# Altium PCB TimeHAT.PcbDoc (part 3 of 3)
Units mil, origin at the board's own origin, x right, y up, seen from the top; angles counter-clockwise.
Board outline 2559.54 x 2225.8 mil, 4 copper layers (L01-TOP, L02-GND, L03-GND, L04-BOT), stack 17.5 mil thick; 36 components, 124 nets, 365 pads, 394 vias.
Unrouted connection lines stored in the file: 194.
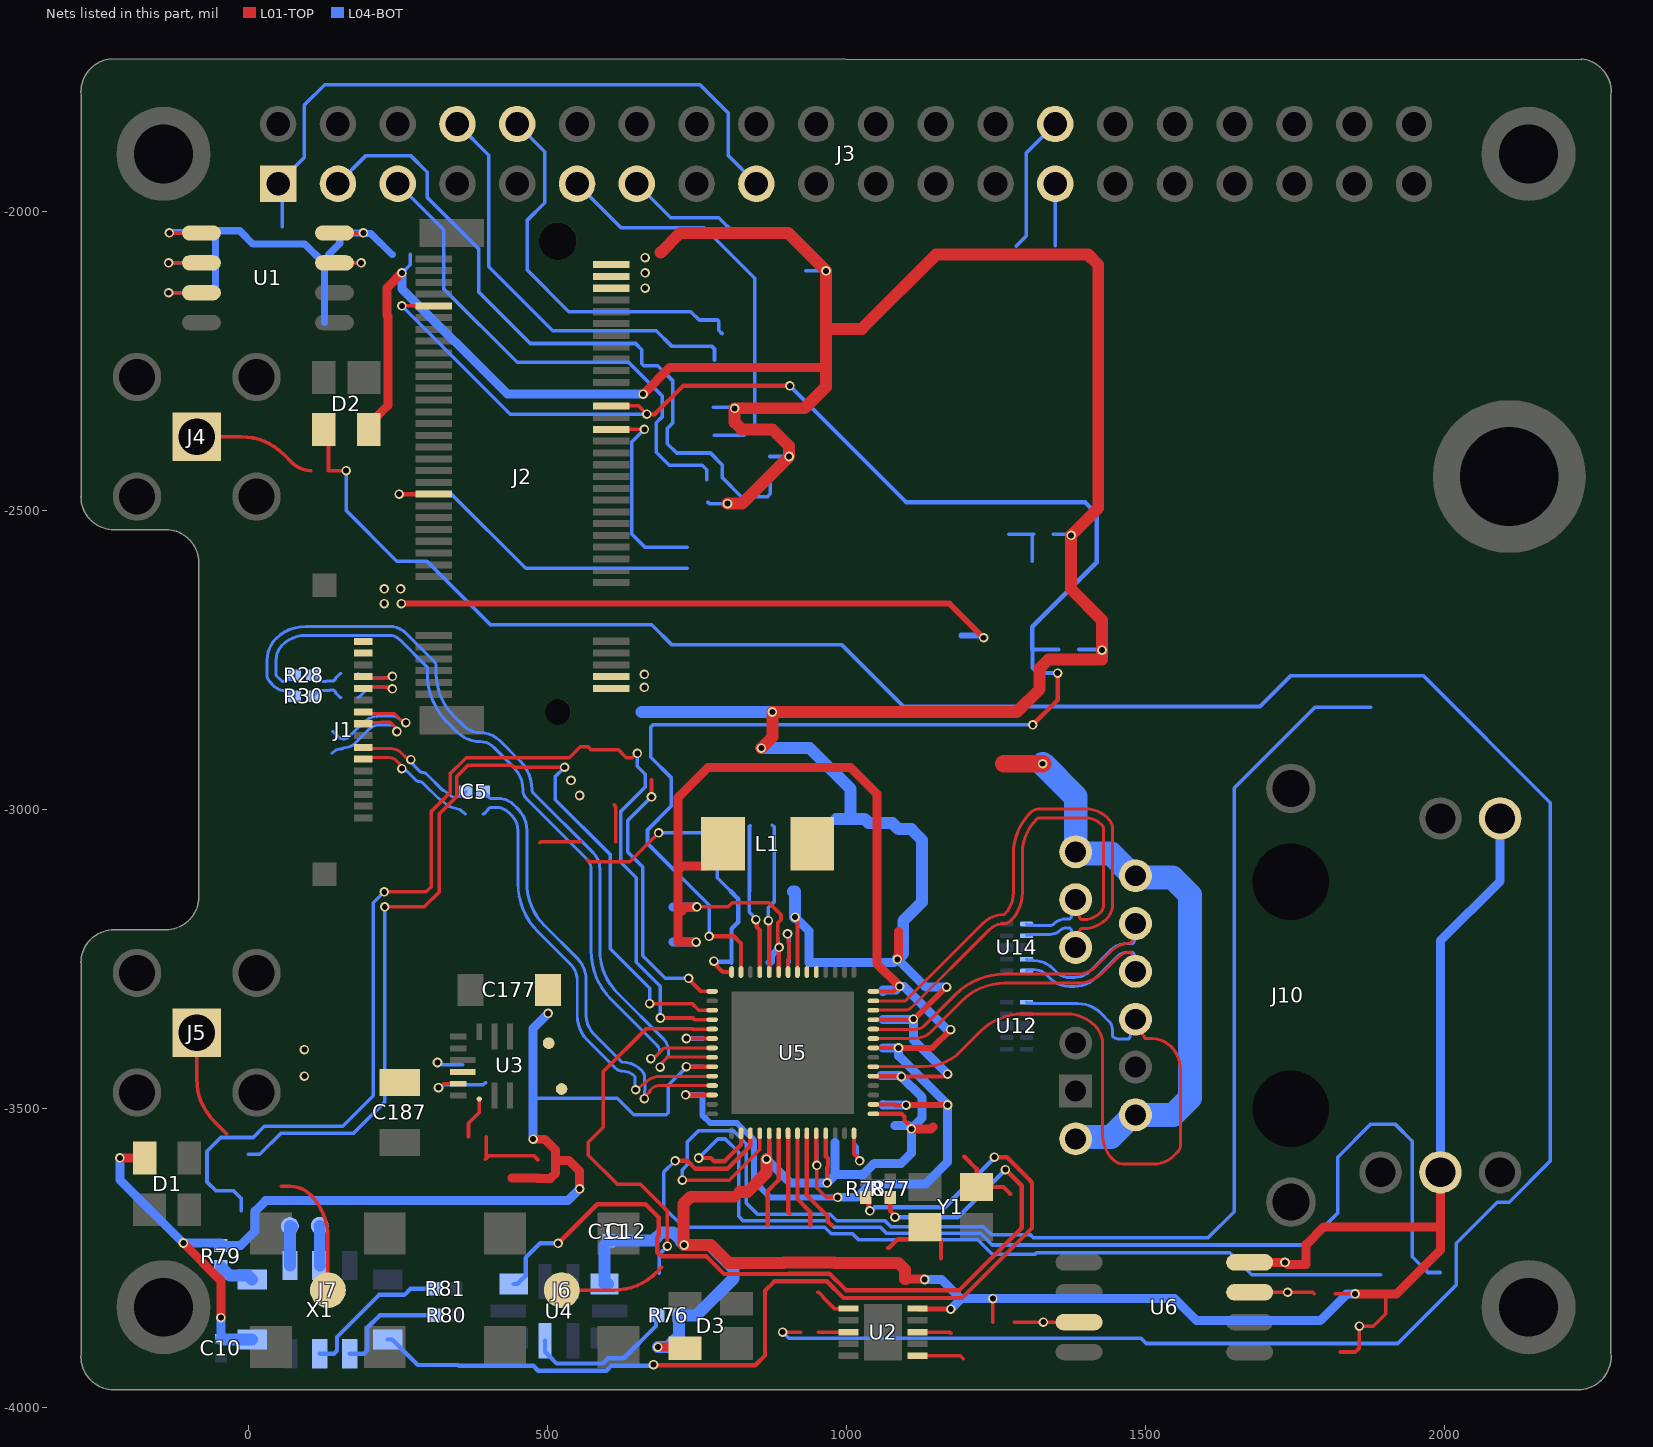
[diagram p4: the nets of this part, all layers, seen from the top]

## Via types
v1: diameter 16, hole 10, L01-TOP to L04-BOT, tented both sides, 392 vias
v2: diameter 16, hole 10, L01-TOP to L04-BOT, 2 vias

## Nets (pads, with @x,y where several pads share a name; then routed paths per layer and width w, separated by ;. In a path a pad name is that pad's centre, name@x,y a point inside that pad or via, vN(x,y) a via of type N, cw(c..) or ccw(c..) an arc to the next point about the centre after c; other vN are vias at no path point) (continued)
MDI_B_P: J10.4 U5.48 U12.1 | length 1258.8
  L01-TOP w5: U5.48@1044.78,-3429.93 1045.15,-3429.55 1130.49,-3429.55 ccw(c1130.49,-3345.68) 1189.8,-3404.99 1224.15,-3370.63 cw(c1294.86,-3441.34) 1294.86,-3341.34 1367.71,-3341.34 cw(c1367.71,-3408.55) 1415.23,-3361.03 cw(c1383.3,-3392.96) 1428.46,-3392.96 1428.46,-3544.68 ccw(c1484.94,-3544.68) 1445,-3584.62 1445.12,-3584.74 ccw(c1465,-3564.86) 1465,-3592.98 1512.61,-3592.98 ccw(c1512.61,-3543.44) 1547.64,-3578.47 1553.96,-3572.15 ccw(c1543.37,-3561.55) 1558.35,-3561.55 1558.35,-3434.76 ccw(c1503.16,-3434.76) 1542.18,-3395.74 1542.09,-3395.64 ccw(c1511.39,-3426.34) 1511.39,-3382.93 1500.35,-3382.93 1498.07,-3380.65 cw(c1499.65,-3379.07) 1497.42,-3379.07 ccw(c1495.19,-3379.07) 1496.77,-3377.5 1492.84,-3373.57 cw(c1515.99,-3350.42) J10.4@1483.25,-3350.42
  L04-BOT w5: U12.1@1300.85,-3321.91 ccw(c1304.32,-3318.44) 1304.32,-3323.35 1310.85,-3323.35 cw(c1310.85,-3324.89) 1311.95,-3323.8 ccw(c1313.04,-3322.71) 1313.04,-3324.25 1386.52,-3324.25 cw(c1386.52,-3379.23) 1425.4,-3340.35 1439.08,-3354.04 cw(c1426.32,-3366.81) 1444.37,-3366.81 1444.37,-3378.74 ccw(c1456.18,-3366.94) 1456.18,-3383.63 1471.67,-3383.63 ccw(c1464.6,-3376.56) 1474.6,-3376.56 1474.6,-3371.3 cw(c1504.13,-3371.3) J10.4@1483.25,-3350.42
MDI_C_N: J10.9 U5.52 U14.4 | length 757
  L01-TOP w5: U5.52@1044.78,-3366.93 1045.15,-3367.31 1114.52,-3367.31 ccw(c1114.52,-3344.38) 1130.73,-3360.6 ; 1130.74,-3360.59 1182.56,-3308.77 cw(c1263.71,-3389.92) 1263.71,-3275.15 1385.79,-3275.15 ccw(c1385.79,-3230.62) 1417.28,-3262.11 1443.02,-3236.37 cw(c1474.8,-3268.15) 1474.8,-3223.21 1474.85,-3223.21 ccw(c1467.91,-3216.27) 1477.72,-3216.27 1477.72,-3203.76 cw(c1496.59,-3203.76) J10.9@1483.25,-3190.42
  L04-BOT w5: U14.4@1300.85,-3250.1 ccw(c1304.32,-3246.63) 1304.32,-3251.54 1310.85,-3251.54 cw(c1310.85,-3253.08) 1311.95,-3251.99 ccw(c1313.04,-3250.9) 1313.04,-3252.44 1313.09,-3252.44 cw(c1313.09,-3298.01) 1345.31,-3265.79 1351.14,-3271.62 ccw(c1372.83,-3249.93) 1372.83,-3280.6 1380.89,-3280.6 ccw(c1380.89,-3243.72) 1406.96,-3269.8 1441.77,-3235 cw(c1468.71,-3261.94) 1468.71,-3223.84 1478.74,-3223.84 ccw(c1471.66,-3216.77) 1481.66,-3216.77 1481.66,-3194.25 cw(c1487.08,-3194.25) J10.9@1483.25,-3190.42
MDI_C_P: J10.7 U5.51 U14.5 | length 754.5
  L01-TOP w5: U5.51@1044.78,-3382.68 1045.15,-3382.31 1114.55,-3382.31 ccw(c1114.55,-3344.45) 1141.32,-3371.22 1193.1,-3319.44 cw(c1263.81,-3390.15) 1263.81,-3290.15 1385.83,-3290.15 ccw(c1385.83,-3230.69) 1427.87,-3272.74 1453.59,-3247.02 cw(c1474.85,-3268.28) 1474.85,-3238.21 cw(c1467.78,-3245.28) 1477.78,-3245.28 1477.78,-3257.21 ccw(c1496.46,-3257.21) J10.7@1483.25,-3270.42
  L04-BOT w5: U14.5@1300.85,-3269.79 cw(c1304.32,-3273.26) 1304.32,-3268.35 1310.85,-3268.35 ccw(c1310.85,-3266.8) 1311.95,-3267.9 cw(c1313.04,-3268.99) 1313.04,-3267.44 cw(c1313.04,-3298.15) 1334.75,-3276.44 1340.59,-3282.28 ccw(c1372.75,-3250.11) 1372.75,-3295.6 1380.92,-3295.6 ccw(c1380.92,-3243.8) 1417.55,-3280.43 1452.31,-3245.66 cw(c1468.79,-3262.14) 1468.79,-3238.84 1478.74,-3238.84 cw(c1471.66,-3245.91) 1481.66,-3245.91 1481.66,-3266.59 ccw(c1487.08,-3266.59) J10.7@1483.25,-3270.42
MDI_D_N: J10.12 U5.55 U14.2 | length 960.3
  L01-TOP w5: U5.55@1044.78,-3319.69 1045.15,-3320.06 1098.14,-3320.06 1228.22,-3189.99 cw(c1263.85,-3225.62) 1263.85,-3175.23 1263.91,-3175.23 ccw(c1227.23,-3138.56) 1279.1,-3138.56 1279.1,-3073.37 cw(c1375.82,-3073.37) 1307.43,-3004.98 1307.5,-3004.9 cw(c1322.96,-3020.37) 1322.96,-2998.5 1399.54,-2998.5 cw(c1399.54,-3050.44) 1436.26,-3013.71 1437.86,-3015.31 cw(c1420.95,-3032.22) 1444.87,-3032.22 1444.87,-3158.37 cw(c1410.22,-3158.37) 1434.72,-3182.87 1434.64,-3182.95 cw(c1396.43,-3144.74) 1396.43,-3198.78 1392.08,-3198.78 ccw(c1399.15,-3205.85) 1389.15,-3205.85 1389.15,-3216.17 cw(c1369.01,-3216.17) J10.12@1383.25,-3230.42
  L04-BOT w5: U14.2@1300.85,-3210.73 cw(c1304.32,-3214.2) 1304.32,-3209.29 1310.85,-3209.29 ccw(c1310.85,-3207.75) 1311.95,-3208.84 cw(c1313.04,-3209.94) 1313.04,-3208.39 1341.32,-3208.39 ccw(c1341.32,-3186.68) 1356.67,-3202.03 ; 1356.69,-3202.01 cw(c1366.85,-3212.16) 1366.85,-3197.8 1373.59,-3197.8 cw(c1366.52,-3204.88) 1376.52,-3204.88 1376.52,-3214.18 ccw(c1399.49,-3214.18) J10.12@1383.25,-3230.42
MDI_D_P: J10.10 U5.54 U14.1 | length 914.7
  L01-TOP w5: U5.54@1044.78,-3335.44 1045.15,-3335.06 1098.15,-3335.06 ccw(c1098.15,-3320.08) 1108.74,-3330.68 1238.79,-3200.63 cw(c1263.91,-3225.75) 1263.91,-3190.23 1263.96,-3190.23 ccw(c1263.96,-3175.36) 1274.47,-3185.87 1274.53,-3185.81 ccw(c1227.31,-3138.59) 1294.1,-3138.59 1294.1,-3073.4 cw(c1375.9,-3073.4) 1318.05,-3015.56 cw(c1323.04,-3020.54) 1323.04,-3013.5 1399.48,-3013.5 cw(c1399.48,-3050.57) 1425.7,-3024.36 1427.21,-3025.87 cw(c1420.79,-3032.28) 1429.87,-3032.28 1429.87,-3158.34 cw(c1410.14,-3158.34) 1424.09,-3172.28 cw(c1396.35,-3144.54) 1396.35,-3183.78 1392.08,-3183.78 cw(c1399.15,-3176.7) 1389.15,-3176.7 1389.15,-3164.66 ccw(c1369.01,-3164.66) J10.10@1383.25,-3150.42
  L04-BOT w5: U14.1@1300.85,-3191.05 ccw(c1304.32,-3187.58) 1304.32,-3192.48 1310.85,-3192.48 cw(c1310.85,-3194.03) 1311.95,-3192.94 ccw(c1313.04,-3191.84) 1313.04,-3193.39 1341.29,-3193.39 ccw(c1341.29,-3186.61) 1346.09,-3191.4 1346.13,-3191.36 cw(c1366.79,-3212.02) 1366.79,-3182.8 1373.59,-3182.8 ccw(c1366.52,-3175.73) 1376.52,-3175.73 1376.52,-3166.66 cw(c1399.49,-3166.66) J10.10@1383.25,-3150.42
NetC7_1: U1.8 | length 617.2
  L01-TOP w6: U1.8@143.3,-2035.24 v1(191.62,-2035.24)
  L04-BOT w12: -57.49,-2134.56 -55.52,-2132.6 -55.52,-2033.46 -53.55,-2031.5 -15.11,-2031.5 7.33,-2053.94 55.7,-2053.94 94.28,-2053.94 125.58,-2085.24 126.56,-2085.24 ; 126.56,-2185.24 126.56,-2135.24 126.56,-2085.24 ; 240.36,-2071.21 239.38,-2071.21 204.17,-2036 192.39,-2036 v1(191.62,-2035.24) 157.69,-2035.24 156.33,-2035.24 152.25,-2039.32 152.25,-2052.85 133.36,-2071.74 133.36,-2079.43 127.55,-2085.24 126.56,-2085.24
NetC9_1:  | length 130.1
  L01-TOP w6: 395.82,-3584.58 397.13,-3583.27 ; 397.13,-3546.74 397.13,-3583.27 ; 483.85,-3585.76 476.57,-3578.48 439.97,-3578.48 401.92,-3578.48 397.13,-3583.27
NetC72_2: Y1.3 | length 142.1
  L01-TOP w7.27: 1069.38,-3733.17 1070.37,-3733.17 1085.58,-3717.96 1110.9,-3717.96 Y1.3@1130.88,-3697.97 1134.82,-3697.97 1158,-3721.15 1158,-3750.44
NetC73_2: Y1.1 | length 120.7
  L01-TOP w7.27: 1196.95,-3580.19 1217.5,-3600.74 Y1.1@1217.5,-3631.04 1262.39,-3631.04 1273.99,-3642.64
NetD12_1:  | length 62.3
  L01-TOP w6: 611.18,-2991.76 cw(c604.35,-2998.6) 614.01,-2998.6 614.01,-3053.29
NetJ2_35: J2.35 | length 590.7
  L01-TOP w7.27: v1(251.67,-2472.16) J2.35@309.26,-2472.16
  L04-BOT w6: v1(251.67,-2472.16) 339.08,-2472.16 463.24,-2596.33 733.35,-2596.33
NetJ2_46: J2.46 | length 340.2
  L01-TOP w6: J2.46@606.5,-2363.9 v1(661.72,-2363.9)
  L04-BOT w6: v1(661.72,-2363.9) 640.95,-2384.67 640.95,-2539 662.7,-2560.75 733.26,-2560.75
NetJ3_3: J3.3 | length 1173.8
  L04-BOT w6: J3.3@149.09,-1952.97 196.26,-1905.8 270.67,-1905.8 298.6,-1933.74 298.6,-1975.77 384.82,-2061.98 384.82,-2134 471.01,-2220.19 646.85,-2220.19 657.26,-2230.61 657.26,-2254 660.78,-2257.51 684.17,-2257.51 709.52,-2282.86 709.52,-2352.88 700.1,-2362.3 700.1,-2387.71 715.66,-2403.27 772.23,-2403.27 791.72,-2422.76 791.72,-2444.09 823.84,-2476.21 867.74,-2476.21 872.36,-2471.59 872.36,-2446.57
NetJ3_5: J3.5 | length 859.2
  L04-BOT w6: J3.5@249.09,-1952.97 326.2,-2030.08 326.2,-2128.96 448.93,-2251.69 635.14,-2251.69 691.99,-2308.54 691.99,-2342.34 681.45,-2352.88 681.45,-2402.17 703.21,-2423.93 758.76,-2423.93 766.13,-2431.31 766.13,-2447.67
NetJ3_8: J3.8 | length 713.5
  L04-BOT w6: J3.8@349.09,-1852.97 401.57,-1905.45 401.57,-2091.97 508.47,-2198.86 681.45,-2198.86 706.99,-2224.41 774.17,-2224.41 779.04,-2229.28 779.04,-2247.67
NetJ3_10: J3.10 | length 654.6
  L04-BOT w6: J3.10@449.09,-1852.97 495.28,-1899.16 495.28,-1984.46 465.5,-2014.24 465.5,-2096.89 535.47,-2166.87 739.54,-2166.87 753.5,-2180.82 784.21,-2180.82 786.16,-2182.78 786.16,-2197.85 791.72,-2203.41
NetJ3_11: J3.11 | length 683
  L04-BOT w6: J3.11@549.09,-1952.97 622.79,-2026.66 761.94,-2026.66 846.51,-2111.23 846.51,-2355.98 828.75,-2373.74 778.53,-2373.74
NetJ3_13: J3.13 | length 197.7
  L04-BOT w6: J3.13@649.09,-1952.97 705.69,-2009.57 786.18,-2009.57 811.77,-2035.16 812.75,-2035.16
NetJ3_27: J3.27 | length 103.5
  L04-BOT w6: 1349.09,-2056.44 J3.27@1349.09,-1952.97
NetJ3_28: J3.28 | length 231.7
  L04-BOT w6: 1284.11,-2057.79 1284.11,-2056.81 1300.85,-2040.08 1300.85,-1901.21 J3.28@1349.09,-1852.97
NetJ4_1: J4.1 | length 208
  L01-TOP w6: J4.1@-86.96,-2376.21 -12.42,-2376.21 cw(c-12.42,-2476.21) 58.29,-2405.5 72.7,-2419.91 ccw(c103.82,-2388.79) 103.82,-2432.79
NetJ5_1: J5.1 | length 185.2
  L01-TOP w6: J5.1@-86.96,-3372.89 -86.96,-3450.65 ccw(c13.04,-3450.65) -57.67,-3521.36 -37.2,-3541.83
NetJ6_1: J6.1 | length 178.9
  L01-TOP w6: J6.1@523.62,-3803.54 611.1,-3803.54 ccw(c611.1,-3703.54) 681.81,-3774.25 690.89,-3765.17
NetJ7_1: J7.1 | length 219.4
  L01-TOP w6: 54.71,-3630.04 69.74,-3630.04 cw(c69.74,-3676.32) 102.47,-3643.6 103.18,-3644.31 cw(c32.47,-3715.02) 132.47,-3715.02 J7.1@132.47,-3803.54
NetL1_1: L1.1 U5.5 U5.6
NetR1_1: U5.10 | length 251.5
  L01-TOP w7.27: v1(869.04,-3185.66) 870.45,-3187.07 870.45,-3271.35 U5.10@870.56,-3271.46
  L04-BOT w6: v1(869.04,-3185.66) 869.04,-3163.93 878.68,-3154.29 878.68,-3136.43 878.68,-3028.72 875.72,-3025.76
NetR5_1:  | length 87.5
  L04-BOT w6: 1271.38,-2539 1312.66,-2539 1310.69,-2540.97 1310.69,-2584.37
NetR10_2: U3.17 | length 118
  L01-TOP w6: v1(317.36,-3464.97) 320.06,-3464.97 326.72,-3458.3 U3.17@350.05,-3458.3
  L04-BOT w6: v1(317.36,-3464.97) 320.06,-3464.97 324.76,-3460.27 357.93,-3460.27 392.38,-3460.27 396.31,-3456.34
NetR15_1: U5.11 | length 253.1
  L01-TOP w7.27: v1(848.13,-3183.78) 849.8,-3185.45 849.8,-3196.16 854.82,-3201.18 U5.11@854.82,-3271.46
  L04-BOT w6: 839.07,-3026.66 837.65,-3028.08 837.65,-3136.43 836.92,-3137.17 836.92,-3170.94 848.13,-3182.15 v1(848.13,-3183.78)
NetR17_2: U5.32 | length 2310.8
  L01-TOP w6: v1(725.42,-3619.58) 803.8,-3619.58 854.82,-3568.56 U5.32@854.82,-3541.15
  L04-BOT w6: v1(725.42,-3619.58) 725.42,-3602.08 733.6,-3593.9 733.6,-3555.71 752.27,-3537.04 810.95,-3537.04 832.4,-3558.48 832.4,-3657.78 851.12,-3676.5 972.41,-3676.5 983.41,-3687.5 1064.29,-3687.5 1074.29,-3697.5 1228.75,-3697.5 1241.89,-3710.64 1306.92,-3710.64 1312.37,-3716.08 1604.56,-3716.08 1648.44,-3672.2 1648.44,-2963.74 1783.59,-2828.59 1876.52,-2828.59
NetR18_2: U5.31 | length 1502.3
  L01-TOP w7.27: v1(713.18,-3587.17) 733.76,-3587.17 747.32,-3600.74 800.42,-3600.74 839.07,-3562.09 U5.31@839.07,-3541.15
  L04-BOT w6: v1(713.18,-3587.17) 694.27,-3606.08 694.27,-3665.41 727.36,-3698.5 963.3,-3698.5 974.3,-3709.5 1009.87,-3709.5 1019.87,-3719.5 1219.63,-3719.5 1243.86,-3743.73 1315.15,-3743.73 1317.78,-3741.1 1640.71,-3741.1 1677.56,-3777.95 1893.25,-3777.95
NetR20_2: U5.30 | length 1848.1
  L01-TOP w7.27: v1(752.6,-3582.5) 772.64,-3582.5 778.14,-3587.99 795.81,-3587.99 823.32,-3560.48 U5.30@823.32,-3541.15
  L04-BOT w6: v1(752.6,-3582.5) 784.31,-3550.79 797.2,-3550.79 819.35,-3572.94 819.35,-3680.16 826.69,-3687.5 967.85,-3687.5 978.85,-3698.5 1056.81,-3698.5 1066.81,-3708.5 1224.19,-3708.5 1243.79,-3728.1 1767.97,-3728.1 1821.38,-3674.68 1821.38,-3581.15 1876.15,-3526.38 1918.31,-3526.38 1946.36,-3554.44 1946.36,-3747.98 1972.4,-3774.02 1993.25,-3774.02
NetR31_2: U5.15 | length 462.6
  L01-TOP w6: v1(673.68,-2978.32) 673.68,-2950.12 ; v1(735.63,-3281.95) 735.63,-3283.19 756.38,-3303.94 U5.15@775.09,-3303.94
  L04-BOT w6: v1(673.68,-2978.32) 633.86,-3018.14 633.86,-3070.58 659.16,-3095.88 659.16,-3244.46 696.65,-3281.95 v1(735.63,-3281.95)
NetR32_1: U5.8 | length 116.2
  L01-TOP w7.27: v1(901.17,-3207.75) 902.84,-3209.42 902.84,-3222.4 903.76,-3223.32 903.76,-3248.99 902.06,-3250.69 U5.8@902.06,-3271.46
  L04-BOT w7.27: v1(901.17,-3207.75) 901.17,-3210.11 903.76,-3212.7 903.76,-3255 902.06,-3256.7
NetR34_1: U5.34 | length 162
  L01-TOP w7.27: 867.87,-3695.51 867.87,-3638.02 886.31,-3619.58 U5.34@886.31,-3541.15
NetR37_1: U5.35 | length 135.3
  L01-TOP w7.27: U5.35@902.06,-3541.15 902.18,-3541.26 902.18,-3672.67 904.84,-3675.33
NetR40_1: U5.36 | length 163.1
  L01-TOP w7.27: U5.36@917.81,-3541.15 917.81,-3651.2 938.98,-3672.37 938.98,-3695.51
NetR41_1: U5.37 | length 171.5
  L01-TOP w7.27: U5.37@933.56,-3541.15 933.56,-3645.36 968.75,-3680.56 968.75,-3689.31 974.96,-3695.51
NetR42_2: U5.17 | length 1663.3
  L01-TOP w6: v1(227.47,-3162.44) 293.67,-3162.44 318.58,-3137.53 318.58,-3007.08 347.7,-2977.97 347.7,-2944.43 366.22,-2925.91 440.79,-2925.91 443.8,-2928.92 v1(528.45,-2928.92) ; v1(670.65,-3324.25) 741.42,-3324.25 752.6,-3335.44 U5.17@775.09,-3335.44
  L04-BOT w6: -0.73,-3576.38 18.63,-3576.38 53.87,-3541.15 175.26,-3541.15 227.47,-3488.94 v1(227.47,-3162.44) ; v1(528.45,-2928.92) 512.93,-2944.44 512.93,-2983.33 604.54,-3074.94 604.54,-3232.29 670.65,-3298.4 v1(670.65,-3324.25)
NetR43_2: U5.18 | length 2012.8
  L01-TOP w6: v1(226.62,-3137.35) 296.93,-3137.35 305.44,-3128.84 305.44,-3002.9 336.7,-2971.64 336.7,-2939.87 363.65,-2912.92 536.22,-2912.92 554.34,-2894.8 567.59,-2894.8 572.15,-2899.35 617.81,-2899.35 631.38,-2912.92 641.34,-2912.92 648.53,-2905.74 v1(649.86,-2905.74) ; v1(688.37,-3348.4) 742.94,-3348.4 745.73,-3351.19 U5.18@775.09,-3351.19
  L04-BOT w6: -12.55,-3670.99 -12.55,-3650.21 -25.78,-3636.98 -55.44,-3636.98 -69.8,-3622.63 -69.8,-3571.36 -46.69,-3548.25 7.32,-3548.25 26.05,-3529.52 157,-3529.52 208.28,-3478.24 208.28,-3155.69 v1(226.62,-3137.35) ; v1(649.86,-2905.74) 649.86,-2927.29 662.99,-2940.42 662.99,-2962.02 622.11,-3002.91 622.11,-3087.96 648.16,-3114.02 648.16,-3255.01 688.37,-3295.21 v1(688.37,-3348.4)
NetR44_1: U1.7 | length 72.6
  L01-TOP w6: U1.7@143.3,-2085.24 v1(187.98,-2085.24)
  L04-BOT w6: 160.03,-2085.24 v1(187.98,-2085.24)
NetR45_2: U5.19 | length 642
  L01-TOP w6: v1(700.1,-3730.06) 700.1,-3671.24 655.04,-3626.18 616.22,-3626.18 568.05,-3578.02 568.05,-3556.31 593.02,-3531.34 593.02,-3438 664.34,-3366.68 742.86,-3366.68 743.12,-3366.93 U5.19@775.09,-3366.93
  L04-BOT w6: 686.95,-3775.01 686.95,-3743.21 v1(700.1,-3730.06)
NetR46_1: U6.3 | length 108.6
  L01-TOP w6: 1280.19,-3857.1 v1(1329.18,-3857.1) U6.3@1388.82,-3857.1
NetR47_1: U6.7 | length 109.1
  L01-TOP w6: U6.7@1674.26,-3807.1 v1(1737.77,-3807.1) 1779.46,-3807.1 1782.21,-3809.86
NetR48_2: U5.42 | length 82.1
  L01-TOP w7.27: U5.42@1012.3,-3541.15 1012.3,-3575.4 1021.71,-3584.81 v1(1021.71,-3587.17)
  L04-BOT w7.27: 1012.3,-3558.86 1017.49,-3564.05 1017.49,-3580.59 1021.71,-3584.81 v1(1021.71,-3587.17)
NetR49_2: U5.20 | length 70.1
  L01-TOP w6: v1(732.1,-3382.68) U5.20@775.09,-3382.68
  L04-BOT w8: v1(732.1,-3382.68) 759.26,-3382.68
NetR61_1: U2.1 | length 62.5
  L01-TOP w6: 952.23,-3807.1 953.21,-3807.1 960.05,-3813.94 960.05,-3814.93 979.51,-3834.39 U2.1@1002.83,-3834.39
NetR62_2: U2.8 | length 56.7
  L01-TOP w6: U2.8@1118.97,-3873.76 1172.52,-3873.76 1174.73,-3875.97
NetR64_1: U2.3 | length 50.3
  L01-TOP w6: 952.55,-3873.76 U2.3@1002.83,-3873.76
NetR68_2: U2.6 | length 78.1
  L01-TOP w6: U2.6@1118.97,-3913.13 1189.69,-3913.13 1194.93,-3918.37
NetR71_1: U3.1 | length 70.3
  L01-TOP w6: 367.6,-3546.74 367.6,-3524.44 385.49,-3506.56 U3.1@385.49,-3483.89
NetR73_1: U1.1 | length 100.7
  L01-TOP w6: v1(-132.67,-2035.24) U1.1@-79.14,-2035.24
  L04-BOT w6: v1(-132.67,-2035.24) -129.96,-2035.24 -126.22,-2031.5 -87.02,-2031.5
NetR74_1: U1.2 | length 102.1
  L01-TOP w6: v1(-134.13,-2085.24) U1.2@-79.14,-2085.24
  L04-BOT w6: v1(-134.13,-2085.24) -87.02,-2085.24
NetR75_1: U1.3 | length 98.4
  L01-TOP w6: v1(-134.13,-2135.24) U1.3@-79.14,-2135.24
  L04-BOT w6: v1(-134.13,-2135.24) -91.63,-2135.24 -90.96,-2134.56
NetR76_1: R76.1 U4.3 | length 257.3
  L04-BOT w7.21: U4.3@495.39,-3888.04 495.39,-3906.54 502.79,-3913.94 515,-3926.15 592.26,-3926.15 600.88,-3917.52 627.39,-3917.52 681.23,-3863.69 681.23,-3848.57 R76.1@683.97,-3845.83
NetR77_1: R77.1 U4.6 | length 1424.8
  L01-TOP w7.27: v1(517.64,-3725.27) 582.94,-3659.97 663.62,-3659.97 685.81,-3682.16 685.81,-3712.77 683.47,-3715.11 683.47,-3740.09 690.07,-3746.69 765.05,-3746.69 794.99,-3776.64 902.92,-3776.64 903.21,-3776.35 971.71,-3776.35 998.89,-3803.53 1188.78,-3803.53 1292.86,-3699.44 1292.86,-3628.83 1266.2,-3602.17 v1(1265.58,-3602.17) ; R77.1@1072.97,-3648.93 1072.97,-3671.2 1080.91,-3679.14 v1(1080.91,-3681.5)
  L04-BOT w7.27: U4.6@443.23,-3793.27 449.23,-3793.27 463.09,-3779.4 463.09,-3749.48 487.3,-3725.27 v1(517.64,-3725.27) ; v1(1080.91,-3681.5) 1186.25,-3681.5 v1(1265.58,-3602.17)
NetR78_1: R78.1 X1.6 | length 1713.6
  L01-TOP w7.27: v1(677.05,-3928.21) 678.1,-3929.26 847.08,-3929.26 863.47,-3912.88 863.47,-3804.62 879.18,-3788.91 908.01,-3788.91 908.29,-3788.62 966.63,-3788.62 994.85,-3816.84 1192.81,-3816.84 1310.01,-3699.64 1310.01,-3623.87 1307.23,-3621.08 1307.23,-3620.29 1268.09,-3581.15 v1(1247.18,-3581.15) ; R78.1@1032.24,-3648.93 1037.2,-3653.9 1037.2,-3669.32 v1(1038.87,-3670.99)
  L04-BOT w7.27: X1.6@232.15,-3886.16 240.02,-3886.16 282.72,-3928.85 350.65,-3928.85 351.56,-3929.76 475.77,-3929.76 484.39,-3938.39 598.18,-3938.39 606.8,-3929.76 675.5,-3929.76 v1(677.05,-3928.21) ; v1(1038.87,-3670.99) 1041.23,-3670.99 1047.36,-3664.86 1164.29,-3664.86 1247.18,-3581.98 v1(1247.18,-3581.15)
NetR79_2: R79.2 X1.1 | length 61.3
  L04-BOT w20: R79.2@-46.61,-3764.5 -46.52,-3764.5 -31.59,-3779.42 -0.96,-3779.42 X1.1@5.77,-3786.16
NetR80_2: R80.2 X1.7 | length 192.3
  L04-BOT w7.21: X1.7@168.96,-3909.98 192.57,-3909.98 198.27,-3904.27 198.27,-3866.52 218.97,-3845.83 R80.2@312.55,-3845.83
NetR81_2: R81.2 X1.8 | length 250.7
  L04-BOT w7.21: X1.8@118.96,-3909.98 142.57,-3909.98 147.56,-3904.99 147.56,-3881.81 217.87,-3811.49 260.32,-3811.49 270.49,-3801.32 R81.2@311.03,-3801.32
P0V95_I225: L1.2 U5.9 U5.26 U5.38 U5.44 U5.50 U5.56 | length 3036.5
  L01-TOP w6: v1(749.57,-3162.44) 801.67,-3162.44 808.51,-3155.6 870.35,-3155.6 890.25,-3175.5 890.25,-3183.92 885.17,-3188.99 885.17,-3214.38 885.21,-3214.42 885.21,-3228.3 v1(887.13,-3230.21) ; v1(950.19,-3595.03) 950.19,-3632.27 966.14,-3648.22 v1(985.03,-3648.22)
  L01-TOP w7.27: U5.9@886.31,-3271.46 886.43,-3271.35 886.43,-3230.91 v1(887.13,-3230.21) ; U5.38@949.3,-3541.15 949.42,-3541.26 949.42,-3594.26 v1(950.19,-3595.03) ; U5.50@1044.78,-3398.43 v1(1086.87,-3398.43) ; U5.56@1044.78,-3303.94 1078.02,-3303.94 1086.36,-3295.6 v1(1088.72,-3295.6) ; U5.44@1044.83,-3492.97 1081.11,-3492.97 1082.24,-3494.1 v1(1099.64,-3494.1)
  L01-TOP w8: v1(730.6,-3476.83) 730.88,-3477.11 775.03,-3477.11 U5.26@775.09,-3477.17
  L01-TOP w10: v1(1086.87,-3398.43) 1143.55,-3398.43 v1(1174.06,-3367.92) ; v1(1099.64,-3494.1) 1099.74,-3494 1169.06,-3494 v1(1169.16,-3493.91)
  L01-TOP w15: 724.66,-3169.19 724.66,-3166.01 728.23,-3162.44 v1(749.57,-3162.44) ; v1(748.22,-3221.57) 717.92,-3221.57 717.92,-3101.92 ; L1.2@793.28,-3056.92 793.28,-3065.41 764.28,-3094.42 725.42,-3094.42 717.92,-3101.92 ; v1@1088.53,-3295.41 1050.68,-3257.56 1050.68,-2973.3 1006.39,-2929 768.54,-2929 717.92,-2979.62 717.92,-3101.92
  L04-BOT w6: 949.3,-3556.89 950.19,-3557.78 v1(950.19,-3595.03)
  L04-BOT w10: v1(730.6,-3476.83) 730.77,-3477 759.17,-3477 759.34,-3477.17 759.34,-3511.71 771.67,-3524.04 816.34,-3524.04 845.4,-3553.1 845.4,-3621.66 871.96,-3648.22 v1(985.03,-3648.22)
  L04-BOT w12: 870.56,-3255.71 872.53,-3255.71 874.41,-3253.84 874.41,-3244.02 887.13,-3231.29 v1(887.13,-3230.21)
  L04-BOT w15: 710.02,-3221.57 v1(748.22,-3221.57) ; 710.02,-3162.44 v1(749.57,-3162.44) ; v1(985.03,-3648.22) 1018.18,-3648.22 1040.61,-3625.8 1132.41,-3625.8 1169.16,-3589.05 v1(1169.16,-3493.91) ; 1060.53,-3492.92 1060.53,-3493.53 1060.9,-3493.91 1099.45,-3493.91 v1(1099.64,-3494.1) ; 1060.53,-3398.43 v1(1086.87,-3398.43) 1086.87,-3411.62 v1@1168.97,-3493.71 ; 1060.53,-3303.94 1060.53,-3301.97 1060.9,-3301.6 1082.45,-3301.6 1088.45,-3295.6 v1(1088.72,-3295.6) 1088.91,-3295.79 1096.14,-3295.79 1168.07,-3367.73 1173.87,-3367.73 v1(1174.06,-3367.92)
P3V3: C10.1 C11.2 C12.1 C177.1 D1.4 D2.4 D3.4 J2.2 J2.4 J2.70 J2.72 J2.74 J10.14 J10.16 R76.2 R79.1 U2.10 U3.7-8-9 U4.9 U5.7 U5.14 U5.23 U5.33 U5.39 U5.43 U5.47 U5.53 U6.8 X1.10 | length 13063.6
  L01-TOP w6: 486.98,-3055.32 cw(c491.88,-3060.23) 491.88,-3053.29 554.96,-3053.29 ; 566.75,-3084.08 569.84,-3087.17 637.21,-3087.17 v1(685.68,-3038.7) ; 1244.59,-3857.1 v1(1244.59,-3817.75) ; 1817.81,-3809.86 v1(1850.75,-3809.86) ; 1825.69,-3907.1 1851.02,-3907.1 1857.82,-3900.3 v1(1857.82,-3863.92) 1880.98,-3863.92 1901.67,-3843.22 1901.67,-3809.86
  L01-TOP w7.27: v1(778.14,-3253.21) 778.14,-3255.57 783.38,-3260.82 783.38,-3262.11 792.73,-3271.46 U5.14@807.57,-3271.46 ; 870.56,-3577.71 U5.33@870.56,-3541.15 ; v1(913.87,-3179.6) 913.87,-3181.96 917.81,-3185.9 U5.7@917.81,-3271.46 ; U5.39@965.05,-3541.15 965.05,-3579.66 968.78,-3583.4 968.78,-3597.18 967.49,-3598.48 v1(967.49,-3624.06) ; U5.43@1044.78,-3508.67 1091.61,-3508.67 1096.76,-3513.81 1096.76,-3520.03 1108.23,-3531.5 v1(1108.23,-3533.87) ; U5.47@1044.78,-3445.67 1090.98,-3445.67 v1(1091.6,-3446.3) 1162.85,-3446.3 1166.8,-3442.35 v1(1169.16,-3442.35) ; U5.53@1044.78,-3351.19 1110.78,-3351.19 v1(1111.85,-3350.12)
  L01-TOP w8: v1(732.14,-3429.88) 775.05,-3429.88 U5.23@775.09,-3429.93 ; U2.10@1119.65,-3834.39 1120.19,-3834.93 1173.69,-3834.93 v1(1174.23,-3835.47)
  L01-TOP w10: v1(1111.85,-3350.12) 1112.91,-3350.12 1166.32,-3296.71 v1(1167.39,-3296.71)
  L01-TOP w15: v1(-215.5,-3582.19) -215.19,-3582.49 D1.4@-174.13,-3582.49 ; v1(-109.35,-3724.72) -46.61,-3787.46 v1(-46.61,-3849.54) ; D2.4@200.38,-2363.89 200.38,-2356.02 232.57,-2323.84 232.57,-2174.73 231.28,-2173.44 231.28,-2127.02 v1(256.21,-2102.08) ; 439.97,-3615.88 440.27,-3616.17 483.55,-3616.17 483.85,-3616.47 504.42,-3616.47 513.2,-3607.68 513.2,-3586.43 ; v1(475.83,-3550.99) 476.02,-3551.18 495.18,-3551.18 513.2,-3569.2 513.2,-3586.43 ; v1(553.62,-3634.17) 553.43,-3633.98 553.43,-3604.6 535.26,-3586.43 513.2,-3586.43 ; v1(659.56,-2304.84) 704.49,-2259.91 965.2,-2259.91 965.55,-2259.56 ; v1(684.32,-3898.76) 727.15,-3898.76 D3.4@729.33,-3900.94 ; v1(1084.83,-3250.37) 1084.83,-3250.1 1086.85,-3248.08 1086.85,-3203.74 ; 1099.22,-3784.81 1129.13,-3784.81 1130.12,-3785.8 v1(1130.39,-3785.8) ; v1(1108.23,-3533.87) 1108.42,-3533.67 1141.35,-3533.67 1144.59,-3530.44 ; U6.8@1674.26,-3757.1 v1(1733.36,-3757.1) 1733.63,-3757.1 1737.2,-3760.67 1768.52,-3760.67 1768.52,-3727.55 1798.31,-3697.76 1993.25,-3697.76 ; v1(1850.75,-3809.86) 1901.67,-3809.86 1920.06,-3809.86 1993.25,-3736.66 1993.25,-3697.76 ; J10.16@1993.25,-3606.42 1993.25,-3697.76
  L01-TOP w20: 688.82,-2068.16 721.82,-2035.16 901.98,-2035.16 v1(965.55,-2098.72) 965.55,-2195.63 ; v1(800.76,-2487.91) 825.02,-2487.91 v1(903.76,-2409.17) 903.76,-2391.94 875.72,-2363.89 824.47,-2363.89 812.75,-2352.18 v1(812.75,-2328.46) 929.62,-2328.46 965.55,-2292.54 965.55,-2259.56 965.55,-2195.63 ; 812.58,-3647.35 738.86,-3647.35 727.15,-3659.06 727.15,-3726.97 v1(728.23,-3728.06) 772.76,-3728.06 802.71,-3758.01 895.2,-3758.01 895.49,-3757.72 979.43,-3757.72 979.72,-3758.01 1086.37,-3758.01 1097.79,-3769.42 1097.79,-3784.73 1097.87,-3784.81 1099.22,-3784.81 ; 820.42,-3639.53 833.91,-3639.53 866.06,-3607.38 v1(866.06,-3584.58) ; v1(857.6,-2896.87) 875.72,-2878.75 v1(875.72,-2836.49) 1284.54,-2836.49 1322.86,-2798.16 1322.86,-2763.42 1337.91,-2748.38 1427.21,-2748.38 v1(1427.21,-2733.04) 1427.21,-2682.73 1375.59,-2631.11 v1(1375.59,-2541.06) 1420.95,-2495.7 1420.95,-2088.3 1403.85,-2071.21 1149.85,-2071.21 1025.43,-2195.63 965.55,-2195.63
  L04-BOT w6: v1(256.21,-2102.08) 269.89,-2088.41 269.89,-2071.21 ; 475.83,-3483.24 476.22,-3482.86 616.28,-3482.86 643.82,-3510.4 698.38,-3510.4 701.89,-3506.88 701.89,-3460.84 732.14,-3430.59 v1(732.14,-3429.88) ; v1(685.68,-3038.7) 769.08,-3038.7 783.67,-3053.29 783.67,-3079.27 783.67,-3113.95 806.15,-3136.43 ; 768.2,-2485.94 770.17,-2487.91 v1(800.76,-2487.91) ; 777.07,-2326.44 810.73,-2326.44 v1(812.75,-2328.46) ; 871.55,-2409.17 v1(903.76,-2409.17) ; 931.53,-2098.72 v1(965.55,-2098.72) ; 1346.12,-2539 1373.53,-2539 v1(1375.59,-2541.06) ; 1388.38,-2732.01 1426.17,-2732.01 v1(1427.21,-2733.04)
  L04-BOT w7.27: v1(778.14,-3253.21) 779.39,-3254.46 806.32,-3254.46 807.57,-3255.71 807.57,-3199.22 818.86,-3187.93 818.86,-3149.15 806.15,-3136.43 ; 870.56,-3577.71 870.56,-3556.89
  L04-BOT w8: v1@732.16,-3429.9 759.32,-3429.9
  L04-BOT w15: v1(-215.5,-3582.19) -215.5,-3618.57 v1(-109.35,-3724.72) R79.1@-46.61,-3724.72 ; C10.1@-46.61,-3885.2 v1(-46.61,-3849.54) ; R79.1@-46.61,-3728.89 -13.58,-3728.89 10.77,-3704.54 10.77,-3671.51 28.39,-3653.9 533.89,-3653.9 v1(553.62,-3634.17) ; v1(256.21,-2102.08) 256.21,-2128.21 432.84,-2304.84 v1(659.56,-2304.84) ; v1(475.83,-3550.99) 475.83,-3483.24 475.83,-3365.56 v1(500.64,-3340.75) ; v1(866.06,-3584.58) 905.54,-3624.06 v1(967.49,-3624.06) 967.49,-3623.79 980.8,-3610.48 ; v1(913.87,-3179.6) 937.49,-3203.22 937.49,-3255.71 980.8,-3255.71 1079.22,-3255.71 1084.56,-3250.37 v1(1084.83,-3250.37) ; 980.8,-3556.89 980.8,-3610.48 ; 1057.57,-3444.86 1089.9,-3444.86 1091.33,-3446.3 v1(1091.6,-3446.3) 1126.24,-3480.94 1126.24,-3515.59 1108.23,-3533.6 v1(1108.23,-3533.87) 1108.23,-3574.58 1091.43,-3591.38 1046.5,-3591.38 1027.39,-3610.48 980.8,-3610.48 ; 1060.53,-3351.19 1060.85,-3351.19 1060.9,-3351.13 1110.56,-3351.13 1111.58,-3350.12 v1(1111.85,-3350.12) 1111.85,-3385.03 v1(1169.16,-3442.35) ; 1080.84,-3528.35 1102.45,-3528.35 ; v1@1086.36,-3250.56 1132.51,-3296.71 v1(1167.39,-3296.71) ; v1(1130.39,-3785.8) 1130.58,-3785.99 1158.85,-3785.99 1190.6,-3817.75 ; v1(1174.23,-3835.47) 1174.23,-3835.2 1190.6,-3818.82 1190.6,-3817.75 ; v1(1850.75,-3809.86) 1850.55,-3810.05 1836.51,-3810.05 1792.06,-3854.5 1585.68,-3854.5 1548.93,-3817.75 v1(1244.59,-3817.75) 1190.6,-3817.75 ; J10.16@1993.25,-3606.42 1993.25,-3219.25 2093.25,-3119.25 J10.14@2093.25,-3014.42
  L04-BOT w20: C10.1@-46.61,-3885.2 -45.65,-3886.16 X1.10@5.77,-3886.16 ; C11.2@594.8,-3728.98 U4.9@594.8,-3793.27 U4.9@600.8,-3793.27 ; C11.2@601.99,-3721 602.39,-3720.61 C12.1@631.56,-3720.61 677.02,-3720.61 690.57,-3707.06 709.63,-3707.06 723.1,-3720.53 723.1,-3722.93 v1(728.23,-3728.06) 771.3,-3728.06 810.76,-3767.52 810.76,-3784.09 749.02,-3845.83 R76.2@719.57,-3845.83 ; 657.26,-2836.34 875.57,-2836.34 v1(875.72,-2836.49) ; v1(684.32,-3898.76) 700.79,-3898.76 719.57,-3879.98 R76.2@719.57,-3845.74 ; v1(857.6,-2896.87) 938.41,-2896.87 1006.5,-2964.96 1006.5,-3015.56 ; 910.17,-3136.43 913.87,-3136.43 v1(913.87,-3179.6) ; 982.72,-3015.56 1006.5,-3015.56 ; v1(1084.83,-3250.37) 1094.75,-3240.46 1094.75,-3203.74 1094.75,-3185.97 1126.03,-3154.68 1126.03,-3116.04 1126.03,-3050.28 1108.23,-3032.48 1086.87,-3032.48 1086.79,-3032.48 1076.48,-3022.18 1036.9,-3022.18 1030.29,-3015.56 1006.5,-3015.56
  other v1: 553.62,-2976.22 539.01,-2950.99 661.72,-2795.29 661.72,-2773.73 662.85,-2127.67 662.85,-2102.08 662.85,-2076.49
P3V3_40PIN: J3.1 J3.17 | length 1104.5
  L04-BOT w6: 55.7,-2024.41 55.7,-1959.57 J3.1@49.09,-1952.97 92.99,-1909.07 92.99,-1821.34 126.93,-1787.4 754.9,-1787.4 801.93,-1834.43 801.93,-1905.8 J3.17@849.09,-1952.97
P3V3_SW: U3.4-5-6
P5V_PCIE: C187.1 J1.1 J1.2 U3.16 | length 1080.1
  L01-TOP w10: v1(255.28,-2655.36) 1172.11,-2655.36 v1(1229.07,-2712.32)
  L04-BOT w6: v1(315.74,-3422.77) 318.45,-3422.77 322.48,-3426.81 357.93,-3426.81
  L04-BOT w10: 1191.8,-2708.38 1223.51,-2708.38 1227.45,-2712.32 v1(1229.07,-2712.32)
  other v1: 92.99,-3445.71 92.99,-3401.22 226.62,-2655.36 226.62,-2630.63 254.16,-2630.63
PCIE_CLK_C_N: J1.5 | length 115.8
  L01-TOP w5: J1.5@191.52,-2797.12 193.87,-2794.77 224.39,-2794.77 225.28,-2795.67 238.26,-2795.67 v1(240.36,-2797.77)
  L04-BOT w5: 182.78,-2812.17 ccw(c182.78,-2808.89) 185.09,-2811.21 196.76,-2799.54 cw(c208.28,-2811.06) 208.28,-2794.77 231.3,-2794.77 cw(c231.3,-2796.3) 232.38,-2795.22 ccw(c233.46,-2794.14) 233.46,-2795.67 235.54,-2795.67 cw(c235.54,-2802.22) 240.18,-2797.59 v1(240.36,-2797.77)
PCIE_CLK_C_P: J1.4 | length 111.5
  L01-TOP w5: J1.4@191.52,-2777.43 193.87,-2779.77 224.39,-2779.77 225.28,-2778.88 238.26,-2778.88 v1(240.36,-2776.77)
  L04-BOT w5: 182.78,-2772.27 ccw(c200.89,-2754.16) 200.89,-2779.77 231.3,-2779.77 ccw(c231.3,-2778.24) 232.38,-2779.32 cw(c233.46,-2780.41) 233.46,-2778.88 235.54,-2778.88 ccw(c235.54,-2772.32) 240.18,-2776.96 v1(240.36,-2776.77)
PCIE_CLK_N: R30.1 | length 56.7
  L04-BOT w5: R30.1@106.35,-2810.19 ccw(c106.35,-2807.81) 108.03,-2809.49 112.36,-2805.17 cw(c124.47,-2817.29) 124.47,-2800.15 135.42,-2800.15 ccw(c135.42,-2798.67) 136.47,-2799.72 139.3,-2799.72 cw(c139.3,-2806.55) 144.13,-2801.72 144.37,-2801.96 cw(c142.72,-2803.62) 145.06,-2803.62 ccw(c147.39,-2803.62) 145.73,-2805.27 151.68,-2811.21 ccw(c153.99,-2808.89) 153.99,-2812.17
PCIE_CLK_P: R28.1 | length 56.7
  L04-BOT w5: R28.1@106.35,-2775.12 cw(c106.35,-2777.49) 108.03,-2775.81 112.36,-2780.13 ccw(c124.47,-2768.02) 124.47,-2785.15 129.21,-2785.15 ccw(c129.21,-2783.67) 130.25,-2784.72 138.95,-2784.72 ccw(c138.95,-2777.06) 144.37,-2782.47 ccw(c142.72,-2780.82) 145.06,-2780.82 cw(c147.39,-2780.82) 145.73,-2779.17 151.68,-2773.23 cw(c153.99,-2775.55) 153.99,-2772.27
PCIE_CLK_R_N: R30.2 U5.22 | length 1354.5
  L01-TOP w5: 691.91,-3422.47 700.57,-3413.8 774.72,-3413.8 U5.22@775.09,-3414.18
  L04-BOT w5: R30.2@76.82,-2810.19 72.4,-2805.77 ccw(c65.35,-2812.82) 65.35,-2802.85 cw(c65.35,-2795.29) 60.01,-2800.64 cw(c60,-2775.75) 42.4,-2793.35 35.79,-2786.73 cw(c48.31,-2774.21) 30.6,-2774.21 30.6,-2749.99 cw(c81.74,-2749.99) 45.58,-2713.82 45.67,-2713.74 cw(c94.81,-2762.89) 94.81,-2693.38 235.62,-2693.38 cw(c235.62,-2732.11) 263.01,-2704.73 309.22,-2750.93 cw(c298.62,-2761.52) 313.6,-2761.52 313.6,-2772.38 ccw(c413.6,-2772.38) 342.89,-2843.09 359.43,-2859.63 ccw(c387.08,-2831.98) 387.08,-2871.08 387.16,-2871.08 cw(c387.16,-2917.72) 420.14,-2884.74 453.82,-2918.42 ; 453.83,-2918.43 cw(c405.87,-2966.37) 473.68,-2966.37 473.68,-2966.47 ccw(c481.4,-2966.47) 475.94,-2971.93 576.06,-3072.05 cw(c548.6,-3099.51) 587.44,-3099.51 587.44,-3235.9 ccw(c687.44,-3235.9) 616.73,-3306.61 693.15,-3383.03 cw(c670.58,-3405.6) 702.49,-3405.6 702.49,-3405.68 cw(c687.51,-3405.68) 698.11,-3416.27 692.36,-3422.02 ccw(c693.44,-3423.1) 691.91,-3423.1 cw(c690.38,-3423.1) 691.46,-3424.18 689.99,-3425.65 ccw(c694.62,-3430.29) 688.07,-3430.29 v1(688.07,-3430.55)
PCIE_CLK_R_P: R28.2 U5.21 | length 1286.8
  L01-TOP w5: 680.63,-3412.54 694.36,-3398.8 774.72,-3398.8 U5.21@775.09,-3398.43
  L04-BOT w5: R28.2@76.82,-2775.12 71.71,-2780.23 cw(c66.33,-2774.86) 66.33,-2782.46 ccw(c66.33,-2790.06) 60.96,-2784.68 60.01,-2785.64 cw(c60.01,-2775.73) 53,-2782.73 46.4,-2776.13 cw(c48.33,-2774.2) 45.6,-2774.2 45.6,-2750.02 cw(c81.82,-2750.02) 56.21,-2724.41 cw(c94.9,-2763.1) 94.9,-2708.38 235.54,-2708.38 cw(c235.54,-2732.31) 252.46,-2715.39 298.6,-2761.53 298.6,-2772.43 ccw(c413.47,-2772.43) 332.25,-2853.66 348.86,-2870.27 ccw(c387.03,-2832.11) 387.03,-2886.08 387.08,-2886.08 cw(c387.08,-2917.91) 409.59,-2895.4 443.14,-2928.96 cw(c405.63,-2966.47) 458.68,-2966.47 ; 458.68,-2966.5 ccw(c481.33,-2966.5) 465.31,-2982.51 565.34,-3082.55 cw(c548.21,-3099.68) 572.44,-3099.68 572.44,-3235.96 ccw(c687.3,-3235.96) 606.08,-3317.18 682.49,-3393.59 cw(c670.41,-3405.67) 687.49,-3405.67 681.07,-3412.09 cw(c679.99,-3411.01) 679.99,-3412.54 ccw(c679.99,-3414.06) 678.91,-3412.98 677.44,-3414.45 cw(c672.81,-3409.82) 672.81,-3416.37 v1(672.55,-3416.37)
PCIE_GF_I225_0_N: J1.8 | length 187.7
  L01-TOP w5: J1.8@191.52,-2856.17 193.87,-2853.83 220.98,-2853.83 221.18,-2853.64 236.62,-2853.64 244.04,-2861.05
  L04-BOT w5: 139.23,-2905.51 140.84,-2903.9 cw(c154.69,-2917.75) 154.69,-2898.17 ccw(c154.69,-2892.86) 158.44,-2896.62 158.49,-2896.62 ccw(c158.49,-2868.61) 178.3,-2888.41 200.48,-2866.23 cw(c220.04,-2885.79) 220.04,-2858.12 237.6,-2858.12 cw(c237.6,-2866.6) 243.6,-2860.61 cw(c242.51,-2861.69) 244.04,-2861.69 ccw(c245.57,-2861.69) 244.49,-2862.77 245.96,-2864.24 cw(c241.33,-2868.87) 247.88,-2868.87 v1(247.88,-2869.14)
PCIE_GF_I225_0_P: J1.7 | length 213.5
  L01-TOP w5: J1.7@191.52,-2836.49 193.87,-2838.83 214.77,-2838.83 214.96,-2838.64 242.84,-2838.64 254.65,-2850.45
  L04-BOT w5: 139.72,-2868.92 cw(c139.72,-2871.3) 141.4,-2869.62 149.83,-2878.05 ccw(c158.44,-2869.44) 158.44,-2881.62 ccw(c158.44,-2868.48) 167.72,-2877.78 ; 167.73,-2877.77 189.93,-2855.57 cw(c219.97,-2885.61) 219.97,-2843.12 237.66,-2843.12 cw(c237.66,-2866.46) 254.16,-2849.96 254.2,-2850 ccw(c255.28,-2848.92) 255.28,-2850.45 cw(c255.28,-2851.98) 256.36,-2850.89 257.83,-2852.37 ccw(c262.47,-2847.73) 262.47,-2854.29 v1(262.73,-2854.29)
PCIE_I225_GF_0_N: U5.24 | length 736.1
  L01-TOP w5: v1(646.99,-3468.39) ccw(c646.99,-3461.21) 652.07,-3466.29 658.7,-3459.67 cw(c659.78,-3460.75) 659.78,-3459.22 ccw(c659.78,-3457.69) 660.86,-3458.77 663.12,-3456.5 cw(c688.37,-3481.75) 688.37,-3446.05 774.72,-3446.05 U5.24@775.09,-3445.67
  L04-BOT w5: 391.44,-3007.54 ccw(c391.44,-3004.27) 393.75,-3006.58 399.8,-3000.54 ccw(c398.41,-2999.15) 400.38,-2999.15 401.84,-2997.68 cw(c405.38,-3001.22) 405.38,-2996.22 414.84,-2996.22 cw(c414.84,-3024.06) 416.65,-2996.28 cw(c414.84,-3024.06) 422.23,-2997.22 cw(c414.84,-3024.06) 429.31,-3000.27 cw(c414.84,-3024.06) 434.53,-3004.37 439.97,-3009.82 cw(c415.18,-3034.59) 450.23,-3034.59 450.23,-3122.94 ccw(c565.1,-3122.94) 483.87,-3204.16 538.59,-3258.88 cw(c512.32,-3285.15) 549.47,-3285.15 549.47,-3344.19 ccw(c608.07,-3344.19) 566.63,-3385.62 613.88,-3432.87 ccw(c624.39,-3422.35) 624.39,-3437.22 cw(c624.39,-3468.2) 646.29,-3446.29 646.29,-3466.71 ccw(c648.68,-3466.71) v1(646.99,-3468.39)
PCIE_I225_GF_0_P: C5.2 U5.25 | length 762.9
  L01-TOP w5: v1(661.84,-3483.24) cw(c669.03,-3483.24) 663.95,-3478.16 670.57,-3471.54 ccw(c669.49,-3470.46) 671.02,-3470.46 cw(c672.55,-3470.46) 671.46,-3469.38 673.68,-3467.16 cw(c688.44,-3481.92) 688.44,-3461.05 774.72,-3461.05 U5.25@775.09,-3461.42
  L04-BOT w5: C5.2@391.86,-2969.72 cw(c391.86,-2972.99) 394.17,-2970.68 400.1,-2976.6 cw(c398.41,-2978.29) 400.8,-2978.29 402.26,-2979.75 ccw(c405.8,-2976.22) 405.64,-2981.21 ccw(c405.8,-2976.22) 405.8,-2981.22 418.16,-2981.22 cw(c418.16,-3016.06) 420.14,-2981.27 cw(c418.16,-3016.06) 424.24,-2981.75 cw(c418.16,-3016.06) 433.36,-2984.71 cw(c418.16,-3016.06) 442.77,-2991.4 ; 442.79,-2991.42 450.61,-2999.24 cw(c415.31,-3034.54) 465.23,-3034.54 465.23,-3122.89 ccw(c565.23,-3122.89) 494.52,-3193.6 549.28,-3248.36 cw(c512.61,-3285.03) 564.47,-3285.03 564.47,-3344.13 ccw(c608.21,-3344.13) 577.28,-3375.06 624.44,-3422.22 cw(c624.44,-3468.07) 656.86,-3435.65 656.94,-3435.73 cw(c644.74,-3447.92) 661.99,-3447.92 ccw(c666.99,-3447.92) 661.99,-3448.05 662.49,-3467.94 cw(c646.99,-3468.39) 662.11,-3471.8 ccw(c666.99,-3472.89) 661.99,-3472.89 661.99,-3483.09 v1(661.84,-3483.24)
PCIE_I225_GF_C_0_N: J1.11 | length 199.4
  L01-TOP w5: J1.11@191.52,-2915.23 cw(c197.18,-2920.88) 197.18,-2912.88 234.91,-2912.88 cw(c234.91,-2930.35) 247.26,-2918 251.93,-2922.67 cw(c250.85,-2923.75) 252.38,-2923.75
  L04-BOT w5: v1(256.21,-2931.2) cw(c256.21,-2938.38) 261.3,-2933.3 262.58,-2934.59 ccw(c263.66,-2933.51) 263.66,-2935.04 cw(c263.66,-2936.56) 264.74,-2935.48 279.74,-2950.48 ccw(c285.48,-2944.73) 285.48,-2952.86 cw(c285.48,-2960.99) 291.23,-2955.24 317.18,-2981.19 335.36,-2994.39 353.72,-2999.96 362.66,-3007.54
PCIE_I225_GF_C_0_P: C5.1 J1.10 | length 199.2
  L01-TOP w5: J1.10@191.52,-2895.54 ccw(c197.18,-2889.88) 197.18,-2897.88 238.01,-2897.88 cw(c238.01,-2922.85) 255.67,-2905.2 262.54,-2912.06 ccw(c263.62,-2910.98) 263.62,-2912.51
  L04-BOT w5: v1(271.06,-2916.35) ccw(c278.25,-2916.35) 273.17,-2921.43 274.46,-2922.72 cw(c273.37,-2923.8) 274.9,-2923.8 ccw(c276.43,-2923.8) 275.35,-2924.88 285.95,-2935.48 ccw(c291.7,-2929.73) 291.7,-2937.86 cw(c291.7,-2945.99) 297.45,-2940.24 323.78,-2966.58 ; 323.79,-2966.58 ccw(c326.87,-2963.49) 326.87,-2967.85 341.57,-2979.39 345.71,-2979.39 354.14,-2977.3 358.45,-2974.34 C5.1@363.07,-2969.72
PCIE_PERST: J2.50 J2.67 U5.13 | length 3129
  L01-TOP w5.5: v1(256.21,-2157.2) J2.67@309.26,-2157.2
  L01-TOP w6: J2.50@606.5,-2324.53 652.14,-2324.53 v1(665.87,-2338.25)
  L01-TOP w7.27: v1(665.87,-2338.25) 679.18,-2338.25 726.37,-2291.06 v1(905.15,-2291.06) ; v1(770.17,-3211.73) 811.46,-3211.73 823.32,-3223.59 U5.13@823.32,-3271.46 ; v1(1311.39,-2857.99) 1353.06,-2816.33 v1(1353.06,-2771.38)
  L04-BOT w5.5: v1(256.21,-2157.2) 437.27,-2338.25 v1(665.87,-2338.25)
  L04-BOT w6: v1(770.17,-3211.73) 770.17,-3159.52 666.99,-3056.34 666.99,-3033.86 706.42,-2994.43 706.42,-2946.12 672.55,-2912.25 672.55,-2861.69 676.24,-2857.99 v1(1311.39,-2857.99) ; 1310.69,-2732.01 1354.92,-2732.01
  L04-BOT w7.27: v1(905.15,-2291.06) 1100.04,-2485.94 1399.21,-2485.94 1418.58,-2505.31 1418.58,-2585.87 1310.69,-2693.76 1310.69,-2732.01 1311.04,-2732.36 1311.04,-2762.39 1320.03,-2771.38 v1(1353.06,-2771.38)
RJ45_CT1: J10.2 J10.5 J10.8 J10.11 | length 1014.6
  L01-TOP w30: 1263.52,-2923.08 v1(1328.08,-2923.08)
  L04-BOT w40: v1(1328.08,-2923.08) 1383.25,-2978.25 J10.11@1383.25,-3070.42 1386.14,-3073.31 1442.05,-3073.31 1479.16,-3110.42 J10.8@1483.25,-3110.42 1486.14,-3113.31 1544.93,-3113.31 1574.29,-3142.67 1574.29,-3482.21 1546.09,-3510.42 1479.16,-3510.42 1442.05,-3547.52 1386.14,-3547.52 J10.2@1383.25,-3550.42
SI_SCL: pad.3@118.58,-3695.93 X1.3 | length 66.6
  L04-BOT w20: pad.3@118.58,-3695.93 118.77,-3696.12 118.77,-3762.15 X1.3@118.96,-3762.34
SI_SDA: pad.3@68.75,-3696.41 X1.2 | length 69.7
  L04-BOT w20: pad.3@68.75,-3696.41 72.47,-3698.19 68.96,-3701.7 X1.2@68.96,-3762.34
SMA1: D2.3 | length 4516.6
  L01-TOP w6: D2.3@125.58,-2363.89 133.35,-2371.66 133.35,-2432.79 v1(162.85,-2432.79) ; v1(893.16,-3873.76) 923.03,-3873.76
  L04-BOT w6: v1(162.85,-2432.79) 162.85,-2499.52 247.69,-2584.37 298.04,-2584.37 404.35,-2690.68 674.2,-2690.68 707.87,-2724.34 992.21,-2724.34 1095.25,-2827.38 1691.46,-2827.38 1743.25,-2775.59 1964.57,-2775.59 2177.17,-2988.19 2177.17,-3587.52 2108.2,-3656.48 2088.28,-3656.48 2019.85,-3724.91 2019.85,-3795.07 1922.14,-3892.78 1501.42,-3892.78 1492.46,-3883.82 903.22,-3883.82 v1(893.16,-3873.76)
pads on no net: D2.2 D3.2 J2. J2.1 J2.6 J2.7 J2.8 J2.9 J2.10 J2.20 J2.21 J2.22 J2.23 J2.24 J2.25 J2.26 J2.28 J2.29 J2.30 J2.31 J2.32 J2.34 J2.36 J2.37 J2.38 J2.41 J2.43 J2.47 J2.49 J2.52 J2.53 J2.54 J2.55 J2.56 J2.58 J2.59 J2.60 J2.61 J2.63 J2.65 J2.66 J2.68 J2.69 J2.75 J3.2 J3.4 J3.7 J3.12 J3.15 J3.16 J3.18 J3.19 J3.21 J3.22 J3.23 J3.24 J3.26 J3.29 J3.31 J3.32 J3.33 J3.35 J3.36 J3.37 J3.38 J3.40 J10.MH1 J10.MH2 U2.2 U2.4 U2.7 U3.2 U3.10 U3.11 U3.15 U3.18 U4.1 U4.2 U4.5 U4.7 U4.8 U4.10 U12.3@1300.85,-3361.28 U12.6 U12.7 U12.8@1267.97,-3361.28 U12.9 U12.10 U14.3@1300.85,-3230.42 U14.6 U14.7 U14.8@1267.97,-3230.42 U14.9 U14.10 X1.4 X1.9

## Polygon pours and split planes (outlines as drawn)
GND on L01-TOP "GND_L01_P159" (solid, remove dead copper, pour order 159): 2278.62,-1744.11 -311.02,-1744.11 -311.02,-3984.25 2283.46,-3984.25
P3V3 on L01-TOP "P3V3_L01_P157" (solid, remove dead copper, pour order 157): 634.4,-2771.38 646.58,-2759.2 676.01,-2759.2 680.46,-2763.65 680.46,-2799.92 669.49,-2810.89 645.04,-2810.89 637.02,-2802.87 592.78,-2802.87 592.78,-2775.27 596.67,-2771.38
P3V3 on L01-TOP "P3V3_L01_P154" (solid, remove dead copper, pour order 154): 644.06,-2133.58 652.81,-2142.34 687.24,-2142.34 700.17,-2129.41 700.17,-2068.16 688.82,-2056.81 642.92,-2056.81 637.02,-2062.71 637.02,-2082.4 575.99,-2082.4 575.99,-2133.58
P3V3 on L01-TOP "P3V3_L01_P152" (solid, remove dead copper, pour order 152): 587.12,-3401.22 587.12,-3335.34 569.84,-3335.34 569.84,-3257.53 579.81,-3257.53 579.81,-3199.49 572.44,-3199.49 572.44,-3074.94 564.47,-3074.94 564.47,-2940.37 465.5,-2940.37 465.5,-3262.01 479.07,-3262.01 479.07,-3357.91 457.34,-3357.91 457.34,-3401.22
P5V_PCIE on L01-TOP "L01-TOP-P5V_PCIE" (solid, remove dead copper, pour order 150): 81.28,-3480.79 286.05,-3480.79 286.05,-3447.19 379.58,-3447.19 379.58,-3431.39 332.81,-3431.39 332.81,-3359.58 81.28,-3359.58
P3V3_SW on L01-TOP "P3V3_SW_L01_P147" (solid, remove dead copper, pour order 147): 457.34,-3456.34 575.05,-3456.34 575.05,-3528.35 457.34,-3528.35 457.34,-3477.99
P5V_PCIE on L01-TOP "P5V_PCIE_L01_P146" (solid, remove dead copper, pour order 146): 267.87,-2743.97 267.87,-2596.18 192.51,-2596.18 192.51,-2712.47 175.78,-2712.47 175.78,-2743.97
NetL1_1 on L01-TOP "NETL1_1_L01_P145" (solid, remove dead copper, pour order 145): 952.92,-3272.06 952.92,-3157.38 978.46,-3131.84 978.46,-3077.99 914.63,-3077.99 905.45,-3087.17 905.45,-3130.75 929.3,-3154.59 929.3,-3272.06
GND on L04-BOT "GND_L04_P162" (solid, remove dead copper, pour order 162): 2278.62,-1744.11 -311.02,-1744.11 -311.02,-3984.25 2283.46,-3984.25
P3V3 on L04-BOT "P3V3_L04_P158" (solid, remove dead copper, pour order 158): 512.93,-2933.51 512.93,-2983.33 537.56,-3007.96 621.5,-3007.96 641.63,-2987.84 641.63,-2878.04 707.27,-2812.4 707.27,-2753.57 697.52,-2743.82 531.39,-2743.82 512.32,-2762.89 514.98,-2765.55 514.98,-2940.37
P3V3 on L04-BOT "P3V3_L04_P156" (solid, remove dead copper, pour order 156): 707.27,-2753.57 652.21,-2753.57 640.95,-2764.82 640.95,-2794.5 659.56,-2813.1 706.57,-2813.1
P3V3 on L04-BOT "P3V3_L04_P155" (solid, remove dead copper, pour order 155): 704.19,-2046.73 653,-2046.73 637.02,-2062.71 637.02,-2126.54 660.04,-2149.57 704.59,-2149.57 704.59,-2047.13
P5V_PCIE on L04-BOT "P5V_PCIE_L04_P153" (solid, remove dead copper, pour order 153): 285.51,-2665.2 285.51,-2605.19 -57.49,-2605.19 -57.49,-3221.57 60.28,-3221.57 60.28,-3480.79 182.78,-3480.79 182.78,-3203.65 122.52,-3203.65 122.52,-3136.43 7.53,-3136.43 7.53,-2675.04 284.88,-2675.04
GND on L04-BOT "GND_L04_P142" (solid, remove dead copper, pour order 142): 804.05,-3508.67 804.05,-3308.01 974.42,-3308.01 974.42,-3508.67
GND on L02-GND "GND_L02_P160" (solid, remove dead copper, pour order 160): 2278.62,-1744.11 -311.02,-1744.11 -311.02,-3984.25 2283.46,-3984.25
GND on L03-GND "GND_L03_P161" (solid, remove dead copper, pour order 161): 2278.62,-1744.11 -311.02,-1744.11 -311.02,-3984.25 2283.46,-3984.25

## Other copper
L01-TOP:
  pour cut-out: 2263.45,-3674.14 1305.08,-3674.14 1305.08,-3507.21 1021.1,-3507.21 1021.1,-3264.01 1162.41,-3264.01 1162.41,-2964.42 2262.94,-2964.42 2262.94,-3106.13
  pour cut-out: 1041.47,-3529.87 781,-3529.87 781,-3277.37 1039.86,-3277.37 1039.86,-3529.86

## Silkscreen, mask and mechanical layers (free items; w line width, h text height)
Top Overlay:
  lines w10: 624.19,-2875.71 2277.73,-2875.71 2277.73,-2009.57 624.19,-2009.57 624.19,-2875.71
  text "2242" at 2170.32,-2257.72 h60 r90
  text "SHIWA_HAT V1" at 1569.29,-2827.38 h90
OUTLINE:
  lines w3.94: 1342.09,-3720.99 cw(c1413.94,-3720.99) 1485.79,-3720.99
Board Shape:
  lines w10: -280.76,-3256.01 cw(c-225.53,-3256.01) -225.53,-3200.79 -138.81,-3200.79 ccw(c-138.81,-3145.56) -83.58,-3145.56 -83.58,-2590.55 ; -280.76,-2476.27 ccw(c-225.53,-2476.27) -225.53,-2531.5 -138.81,-2531.5 cw(c-138.81,-2586.72) -83.58,-2586.72 ; -280.43,-3256.01 -280.43,-3909.9 ccw(c-225.43,-3914.9) -230.43,-3969.9 2228.62,-3969.9 ccw(c2223.62,-3914.9) 2278.62,-3909.9 ; -280.43,-2476.27 -280.43,-1804.09 cw(c-225.43,-1799.09) -230.43,-1744.09 2228.62,-1745.5 ; 2228.75,-1744.11 cw(c2223.62,-1799.09) 2278.62,-1804.09 ; 2278.62,-3859.48 2278.62,-1753.68

## Dimensions
2228.62,-1745.5 to -230.43,-3969.9 on PLACE_BOUND_BOTTOM

## Text inside footprints (layer, text, board x,y; h text height)
U4: Board Layer Stack Bottom Overlay "*" at 556.26,-3955.04 h50 r270; Bottom 3D Body "*" at 556.26,-3871.04 h50 r270